# Altium PCB pcdembedded.PcbDoc
Units mil, origin at the board's own origin, x right, y up, seen from the top; angles counter-clockwise.
Board outline 3915 x 3695 mil, 2 copper layers (Top Layer, Bottom Layer); 35 components, 28 nets, 109 pads, 3 vias.
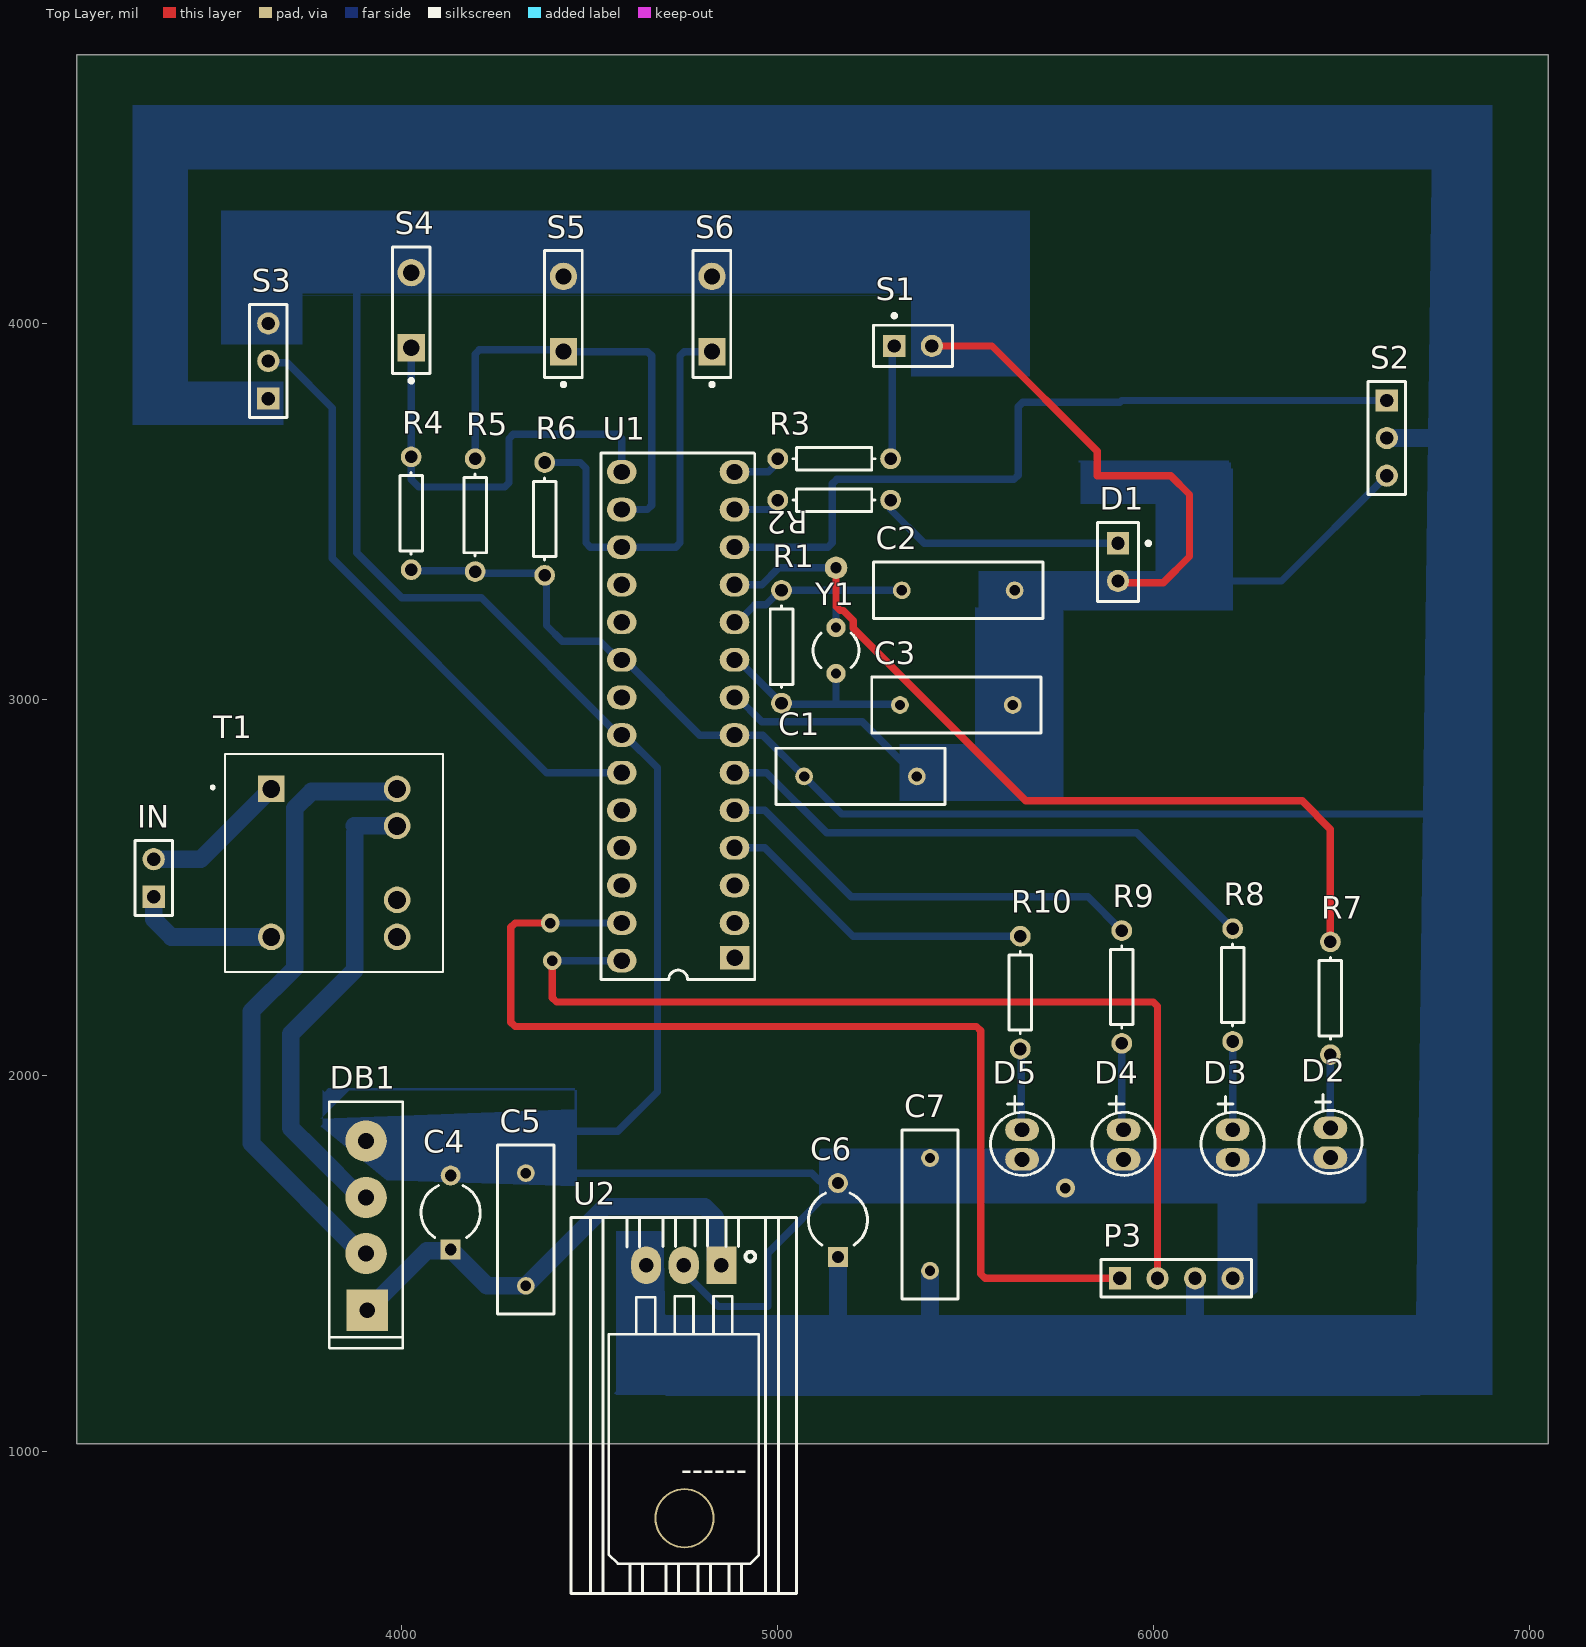
[diagram p0: Top Layer view]
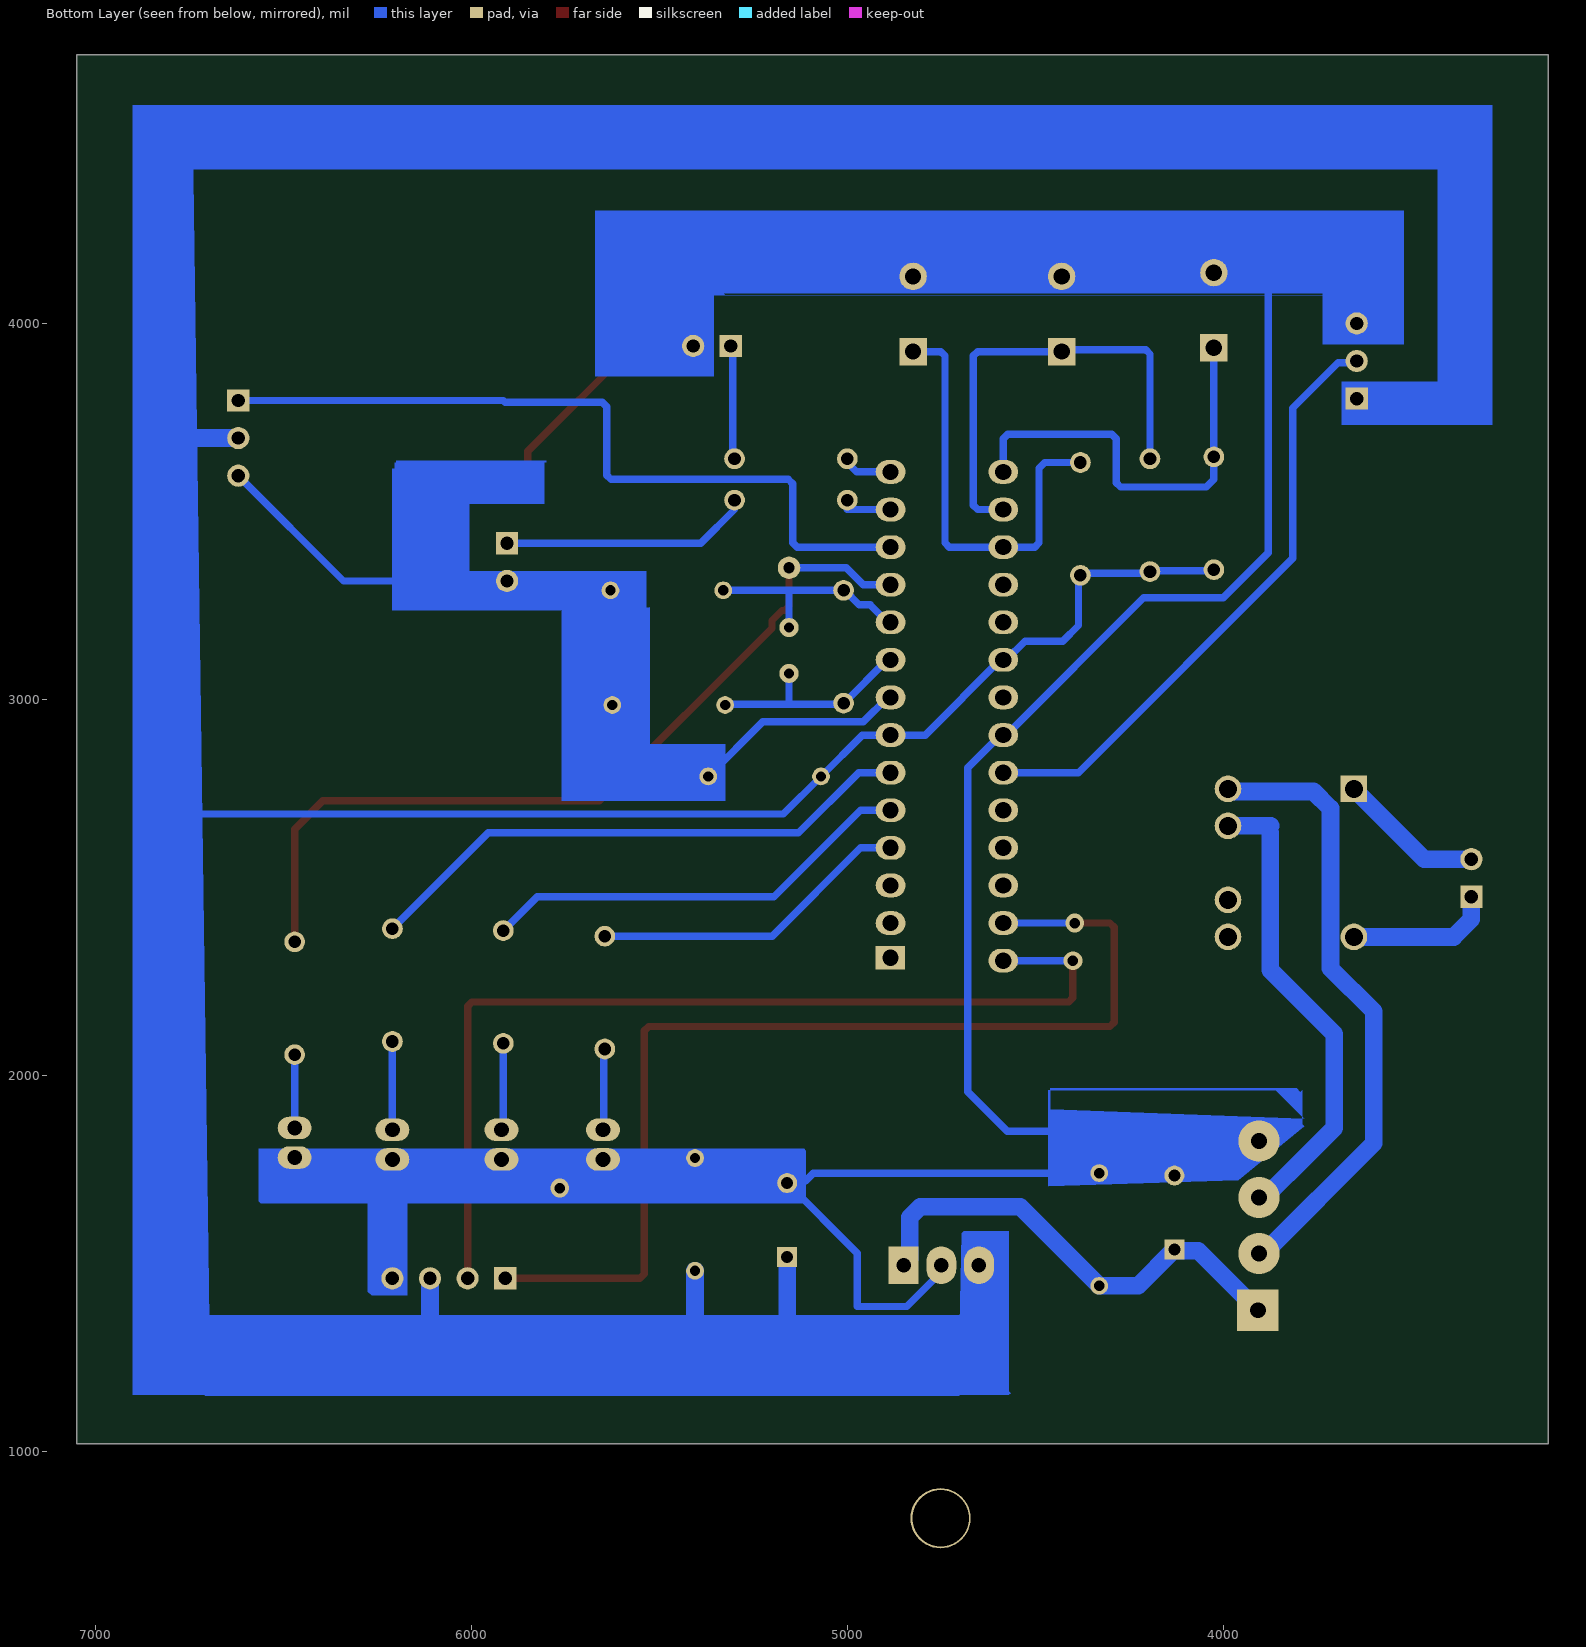
[diagram p1: Bottom Layer view, seen from below]

## Layer stack, top to bottom
Top Solder: solder mask 0.4, Solder Resist, Dk 3.5
Top Layer: signal copper 1.4
Dielectric 1: dielectric 12.6, FR-4, Dk 4.8
Bottom Layer: signal copper 1.4
Bottom Solder: solder mask 0.4, Solder Resist, Dk 3.5

## Board outline
3135,1020 7050,1020 7050,4715 3135,4715

## Design rules (kind name [scope] priority, off if disabled: settings)
Clearance [All] p1: gap=10 ignorepadtopadclearanceinfootprint=FALSE
PolygonConnect [All] p1: connectstyle=Relief reliefconductorwidth=10 reliefentries=4 polygonreliefangle="90 Angle" airgapwidth=10
RoutingVias [All] p1: holewidth=28 width=35 viastyle="Through Hole" minholewidth=28 minwidth=35 maxholewidth=28 maxwidth=35
SolderMaskExpansion [All] p1: expansion=4 istentingtop=FALSE
Width [All] p1: maxlimit=47 minlimit=19.6 preferedwidth=25
30 further rules are at their usual default settings.

## Classes and differential pairs
component class schematicembedded: C1 C2 C3 C4 C5 C6 C7 D1 D2 D3 D5 DB1 IN P3 R1 R2 R3 R4 R5 R6 R7 R8 R9 R10 S1 S2 S3 S4 S5 S6 U1 U2 Y1

## Components (designator, comment, footprint, x,y, rotation, side; value= is the part's Value field where it differs from the comment)
C1 "Cap" RAD-0.3 5220,2795 r180 top value=100pF
C2 "Cap" RAD-0.3 5480,3290 r0 top value=100pF
C3 "Cap" RAD-0.3 5475,2985 r0 top value=100pF
C4 "Cap2" CAPR5-4X5 4130,1635 r90 top value=1000uF/16V
C5 "Cap" RAD-0.3 4330,1590 r270 top value=104
C6 "Cap2" CAPR5-4X5 5160,1615 r90 top value=1000uF/16V
C7 "Cap" RAD-0.3 5405,1630 r270 top value=104
D1 "Bulb" PIN2 5905,3415 r270 top
D2 "LED" CAP10UF 6470,1781.26 r90 top
D3 "LED" CAP10UF 6210,1776.26 r90 top
D4 "LED" CAP10UF 5920,1776.26 r90 top
D5 "LED" CAP10UF 5650,1776.26 r90 top
DB1 "Diode Brideg" "CAU 1A" 3906,1375 r90 top value="Cau 1A"
IN "Header 2" HDR1X2 3340,2475 r90 top
P3 "Header 4" HDR1X4 5910,1460 r0 top
R1 "Res1" AXIAL-0.3 5010,3140 r90 top value=1M
R2 "Res1" AXIAL-0.3 5150,3530 r0 top value=1K
R3 "Res1" AXIAL-0.3 5150,3640 r0 top value=10K
R4 "Res1" AXIAL-0.3 4025,3495 r270 top value=10K
R5 "Res1" AXIAL-0.3 4195,3490 r270 top value=10K
R6 "Res1" AXIAL-0.3 4380,3480 r270 top value=10K
R7 "Res1" AXIAL-0.3 6470,2205 r270 top value=1K
R8 "Res1" AXIAL-0.3 6210,2240 r270 top value=1K
R9 "Res1" AXIAL-0.3 5915,2235 r270 top value=1K
R10 "Res1" AXIAL-0.3 5645,2220 r270 top value=1K
S1 "buzzer" PIN2 5310,3940 r0 top
S2 "servo" HDR1X3 6620,3795 r270 top
S3 "DHT11" HDR1X3 3645,3800 r90 top
S4 "SW-PB" SPST-2 4025,4035 r90 top
S5 "SW-PB" SPST-2 4430,4025 r90 top
S6 "SW-PB" SPST-2 4825,4025 r90 top
T1 "Comment" BOBBIN_EE13/6/6 3820,2565 r0 top
U1 "ATMEGA328P-PU" 27_DIP_7.62mm 4885.39,2312.48 r180 top
U2 "LM7805" QTO-220NH 4850,1495 r180 top
Y1 "XTAL" R38 5155,3130 r180 top

## Footprints (in the part's own frame and the unit in brackets; to place one, negate y for a bottom-side part, rotate by r counter-clockwise, add the part's x,y. Pads: shape width x height; smd on the part's side, far side on the other; paste and mask are expansions set on the pad)
27_DIP_7.62mm [mm]
  rect 2x1.6 hole 1.1: 1(0,0)
  oval 2x1.6 hole 1.1: 2(0.01,-2.35) 3(0.01,-4.89) 4(0.01,-7.43) 5(0.01,-9.97) 6(0.01,-12.51) 7(0.01,-15.05) 8(0.01,-17.59) 9(0.01,-20.13) 10(0.01,-22.67) 11(0.01,-25.21) 12(0.01,-27.75) 13(0.01,-30.29) 14(0.01,-32.83) 15(7.63,-32.83) 16(7.63,-30.29) 17(7.63,-27.75) 18(7.63,-25.21) 19(7.63,-22.67) 20(7.63,-20.13) 21(7.63,-17.59) 22(7.63,-15.05) 23(7.63,-12.51) 24(7.63,-9.97) 25(7.63,-7.43) 26(7.63,-4.89) 27(7.63,-2.35) 28(7.63,0.19)
  silkscreen extent -1.35,-34.1 9.02,1.46, body extent -0.23,-34.26 7.65,1.68, height 4.65
AXIAL-0.3 [mm] "Axial Device, Thru-Hole; 2 Leads; 0.3 in Pin Spacing"
  round 1.4 hole 0.85: 1(-3.81,0) 2(3.81,0)
  silkscreen extent -2.77,-0.76 2.77,0.76
BOBBIN_EE13/6/6 [mm]
  rect 1.8x1.8 hole 1.2: 1(-4.255,5)
  round 1.8 hole 1.2: 2(-4.255,-5) 3(4.255,5) 4(4.255,2.5) 5(4.255,-2.5) 6(4.255,-5)
  silkscreen extent -8.3,-7.36 7.36,7.36
CAP10UF [mil]
  oval 60x90 hole 39.37 unplated: 1(78.74,0) 2(0,0)
  silkscreen extent -42,-84 167,84
CAPR5-4X5 [mm] "Capacitor; 2 Leads"
  rect 1.35x1.35 hole 0.8: 1(-2.5,0)
  round 1.35 hole 0.8: 2(2.5,0)
  silkscreen extent -1.69,-2 1.82,2
"CAU 1A" [mil] "CAU 1A DET"
  rect 110x110 hole 42: 1(0,-2)
  round 110 hole 42: 2(151,1) 3(300,1) 4(450,1)
  silkscreen extent -101,-97 555,99, body extent -62,-90 512,107, height 453
HDR1X2 [mm] "Connector; Header; 2 Position"
  rect 1.5x1.5 hole 0.9: 1(0,0)
  round 1.5 hole 0.9: 2(2.54,0)
  silkscreen extent -1.27,-1.27 3.81,1.27
HDR1X3 [mm] "Connector; Header; 3 Position"
  rect 1.5x1.5 hole 0.9: 1(0,0)
  round 1.5 hole 0.9: 2(2.54,0) 3(5.08,0)
  silkscreen extent -1.27,-1.27 6.35,1.27
HDR1X4 [mm] "Connector; Header; 4 Position"
  rect 1.5x1.5 hole 0.9: 1(0,0)
  round 1.5 hole 0.9: 2(2.54,0) 3(5.08,0) 4(7.62,0)
  silkscreen extent -1.27,-1.27 8.89,1.27
PIN2 [mm] "Photosensitive Diode; 2 Leads"
  rect 1.5x1.5 hole 0.9: 1(0,0)
  round 1.5 hole 0.9: 2(2.54,0)
  silkscreen extent -1.4,-1.4 3.94,2.18
QTO-220NH [mil] "TO-220 - 1-2-3"
  rect 80x100 hole 39: 1(0,0)
  oval 80x100 hole 39: 2(100,0) 3(200,0)
  round 160 hole 150: H(98,673)
  silkscreen extent -200,-127 400,873, body extent -100,-4 300,764, height 165
R38 [mm] "Crystal, Thru-Hole; 2 Leads; Body 3.1 x 8.2 mm (Dia.xH)"
  round 1.3 hole 0.7: 1(0,1.55) 2(0,-1.55)
  silkscreen extent -1.55,-1.19 1.55,1.17
RAD-0.3 [mm] "Radial Cap, Thru-Hole; 2 Leads; 0.3 in Pin Spacing"
  round 1.2 hole 0.7: 1(-3.81,0) 2(3.81,0)
  silkscreen extent -5.71,-1.91 5.71,1.91
SPST-2 [mm] "Switch; 2 Leads"
  rect 1.85x1.85 hole 1.1: 1(-2.54,0)
  round 1.85 hole 1.1: 2(2.54,0)
  silkscreen extent -4.89,-1.27 4.28,1.27

## Part data
C1 C2 C3 C4 C5 C6 C7: "Capacitor", Publisher="Altium Limited"
  C1 C2 C3 C5 C7: LatestRevisionDate=17-Jul-2002, LatestRevisionNote="Re-released for DXP Platform.", PackageDescription="Radial Cap, Thru-Hole; 2 Leads; 0.3 in Pin Spacing", PackageReference=RAD-0.3, Published=8-Jun-2000
  C4 C6: PackageDescription="Capacitor; 2 Leads", PackageReference=CAPR5-4X5, Published=23-Sep-2002
D1: library part Lamp, "Incandescent Bulb", LatestRevisionDate=17-Jul-2002, LatestRevisionNote="Re-released for DXP Platform.", PackageReference=PIN2, Published=24-Mar-1999, Publisher="Altium Limited"
DB1: library part DB, "Convert AC to DC voltage, 4 pin"
IN: "Header, 2-Pin", LatestRevisionDate=17-Jul-2002, LatestRevisionNote="Re-released for DXP Platform.", Publisher="Altium Limited"
P3: "Header, 4-Pin", LatestRevisionDate=17-Jul-2002, LatestRevisionNote="Re-released for DXP Platform.", Publisher="Altium Limited"
R1 R2 R3 R4 R5 R6 R7 R8 R9 R10: "Resistor", LatestRevisionDate=17-Jul-2002, LatestRevisionNote="Re-released for DXP Platform.", PackageDescription="Axial Device, Thru-Hole; 2 Leads; 0.3 in Pin Spacing", PackageReference=AXIAL-0.3, Published=8-Jun-2000, Publisher="Altium Limited"
S1: library part Speaker, "Loudspeaker", LatestRevisionDate=17-Jul-2002, LatestRevisionNote="Re-released for DXP Platform.", PackageReference=PIN2, Published=24-Mar-1999, Publisher="Altium Limited"
S2 S3: library part "Header 3", "Header, 3-Pin", LatestRevisionDate=17-Jul-2002, LatestRevisionNote="Re-released for DXP Platform.", Publisher="Altium Limited"
S4 S5 S6: "Switch", LatestRevisionDate=17-Jul-2002, LatestRevisionNote="Re-released for DXP Platform.", PackageDescription="Switch; 2 Leads", PackageReference=SPST-2, Published=24-Mar-1999, Publisher="Altium Limited"
U1: "ATMEGA328P-PU; 8 bit Microcontroller AVR 20MHz 1; 32kb Flash; 2kb RAM; I2C SPI 2", Case/Package=PDIP, Frequency=20MHz, Manufacturer="Microchip / Atmel", Max Operating Temperature=85°C, Max Supply Voltage=5.5V, Min Operating Temperature=-40°C, Min Supply Voltage=1.8V, Package Quantity=14, Supplier Part Number 1=ATMEGA328P-PU-ND, Category=Microcontrollers, ComponentLink1Description=https://datasheet.ciiva.com/20168/73-4283-20168380.pdf?src-supplier=Rapid+Electronics, ComponentLink1URL=https://datasheet.ciiva.com/20168/73-4283-20168380.pdf?src-supplier=Rapid+Electronics, ComponentLink2Description=https://datasheet.ciiva.com/19457/2139111-19457070.pdf?src-supplier=Jameco, ComponentLink2URL=https://datasheet.ciiva.com/19457/2139111-19457070.pdf?src-supplier=Jameco, ComponentLink3Description=https://datasheet.ciiva.com/1157/1684409-1157696.pdf?src-supplier=Element14, ComponentLink3URL=https://datasheet.ciiva.com/1157/1684409-1157696.pdf?src-supplier=Element14, ComponentLink4Description=https://datasheet.ciiva.com/26818/atmega328p-pu-26818578.pdf?src-supplier=IIIC, ComponentLink4URL=https://datasheet.ciiva.com/26818/atmega328p-pu-26818578.pdf?src-supplier=IIIC, ComponentLink5Description=https://datasheet.ciiva.com/29119/155197-da-01-en-microcontr-atmega328p-pu-8bit-pdip-28-29119593.pdf?src-supplier=Conrad, ComponentLink5URL=https://datasheet.ciiva.com/29119/155197-da-01-en-microcontr-atmega328p-pu-8bit-pdip-28-29119593.pdf?src-supplier=Conrad, ComponentLink6Description=https://datasheet.ciiva.com/15213/getdatasheetpartid-318533-15213133.pdf?src-supplier=Verical, ComponentLink6URL=https://datasheet.ciiva.com/15213/getdatasheetpartid-318533-15213133.pdf?src-supplier=Verical, Contact Plating=Tin,Matte, Core Architecture=AVR, Data Bus Width=8b, Height=3.28mm, Interface=I2C,SPI,UART,USART,2-Wire, Lead Free="Lead Free", Length=37.4mm, Manufacturer Part Number=ATMEGA328P-PU, Max Frequency=20MHz, Memory Size=32KB, Memory Type=FLASH, Mount="Through Hole", Number of ADC Channels=6, Number of I2C Channels=1, Number of I/Os=23, Number of Pins=28, Number of Programmable I/O=23, Number of PWM Channels=6, Number of SPI Channels=1, Number of Timers/Counters=3, Oscillator Type=Internal, Packaging=Rail/Tube, Peripherals="Brown-out Detect/Reset,POR,PWM,WDT", Pricing 1="1=2,08000, 25=1,91000, 100=1,73000 (USD)", Radiation Hardening=No, RAM Size=2KB, REACH SVHC="No SVHC", RoHS=Yes, Stock 1=5280, Supplier 1=Digi-Key, Watchdog Timer=Yes, Width=6.76mm
U2: "TO-220", Text Field1=70, Text Field2=30
Y1: "Crystal Oscillator", LatestRevisionDate=17-Jul-2002, LatestRevisionNote="Re-released for DXP Platform.", PackageDescription="Crystal, Thru-Hole; 2 Leads; Body 3.1 x 8.2 mm (Dia.xH)", PackageReference=R38, Published=8-Jun-2000, Publisher="Altium Limited"

## Free pads (board coordinates)
  round 60 hole 30: 2(5155,3350)

## Via types
v1: diameter 50, hole 28, Top Layer to Bottom Layer, 3 vias

## Nets (pads, with @x,y where several pads share a name; then routed paths per layer and width w, separated by ;. In a path a pad name is that pad's centre, name@x,y a point inside that pad or via, vN(x,y) a via of type N, cw(c..) or ccw(c..) an arc to the next point about the centre after c; other vN are vias at no path point)
+5V: C1.2 C6.1 C7.2 P3.3 R4.2 R5.2 R6.2 S2.2 S3.1 U1.7 U1.20 U2.3 | length 3879.6
  Bottom Layer w19.6: R4.2 4027.5,3342.5 4192.5,3342.5 R5.2 4200,3335 4375,3335 R6.2 4385,3325 4385,3196.48 4426.59,3154.89 4527.23,3154.89 4577.13,3105 U1.20 4592.87,3105 4792.87,2905 U1.7 4960,2905 C1.2 5170,2695 6730,2695 6755,2670 ; 5405,1335 5410,1330
  Bottom Layer w47: 5135,1325 5160,1350 C6.1 ; 5405,1335 C7.2 ; 6105,1240 6198.03,1333.03 ; 6105,1325 6110,1330 P3.3 ; S2.2 6785,3695 6790,3700
bulb: R2.1 U1.13 | length 122.1
  Bottom Layer w19.6: U1.13@4890,3510 U1.13 R2.1@5000,3505
button1: R4.1 S4.1 U1.15 | length 1138.1
  Bottom Layer w19.6: S4.1 R4.1 4025,3585 4045,3565 4273.52,3565 4285,3576.48 4285,3693.52 4296.48,3705 4573.52,3705 4585,3693.52 U1.15
button2: R5.1 S5.1 U1.16 | length 1241.9
  Bottom Layer w19.6: R5.1 4195,3918.52 4206.48,3930 4425,3930 S5.1 4653.52,3925 4665,3913.52 4665,3516.48 4653.52,3505 U1.16
button3: R6.1 S6.1 U1.17 | length 1161
  Bottom Layer w19.6: R6.1 4475,3630 4490,3615 4490,3416.48 4501.48,3405 U1.17 4728.52,3405 4740,3416.48 4740,3913.52 4751.48,3925 S6.1
buzzer: R3.1 U1.14 | length 128.3
  Bottom Layer w19.6: U1.14 4975.39,3605 4995.39,3625 R3.1@5005,3625
"data DHT": S3.2 U1.23 | length 1627.9
  Bottom Layer w19.6: S3.2 3650,3895 3695,3895 3815,3775 3815,3375 4385,2805 U1.23
GND: C1.1 C2.2 C3.2 C4.2 C5.1 C6.2 C7.1 D1.2 D2.2 D3.2 D4.2 D5.2 DB1.4 P3.4 S1.2 S2.3 S3.3 S4.2 S5.2 S6.2 U1.8 U1.22 U2.2 | length 7541
  Top Layer w19.6: S1.2 5570,3940 5850,3660 5850,3595 6045,3595 6095,3545 6095,3380 6025,3310 5910,3310 D1.2
  Bottom Layer w19.6: 3880,4130 3880,3390 4000,3270 4212.13,3270 4577.13,2905 U1.22 4592.87,2905 4680,2817.87 4680,1956.48 4574.4,1850.89 4440.89,1850.89 C5.1 5090.2,1740 5110.36,1719.84 5153.58,1719.84 C6.2 4973.52,1526.94 4973.52,1385 4842,1385 4750,1477 U2.2 ; U1.8 4892.87,3005 4957.87,2940 5225,2940 C1.1 ; D5.2 D5.2@5666.87,1776.26 ; D1.2 6057.47,3315 6340,3315 S2.3
  Bottom Layer w47: 6057.47,3315 6070,3327.53 6070,3430 6095,3455 6095,3543.5
  other v1: 5765,1700
led1: pad.2 R7.1 U1.11 | length 2263.2
  Top Layer w19.6: pad.2 5155,3247.9 5166.48,3236.41 5173.8,3236.41 5200.39,3209.82 5200.39,3189.61 5660,2730 6395,2730 6470,2655 R7.1
  Bottom Layer w19.6: U1.11 4958.02,3305 5003.02,3350 pad.2
led2: R8.1 U1.6 | length 1496.9
  Bottom Layer w19.6: U1.6 4970,2805 5130,2645 5955,2645 R8.1
led3: R9.1 U1.5 | length 1162.5
  Bottom Layer w19.6: U1.5 4965,2705 5195,2475 5825,2475 R9.1
led4: R10.1 U1.4 | length 857.3
  Bottom Layer w19.6: U1.4 4965,2605 5200,2370 R10.1
NetC2_1: C2.1 R1.2 U1.10 Y1.2 | length 581.3
  Bottom Layer w19.6: U1.10 4892.87,3205 4939.06,3251.19 4968.26,3251.19 5007.07,3290 5150,3290 ; Y1.2 5155,3285 5150,3290 ; C2.1 5150,3290
NetC3_1: C3.1 R1.1 U1.9 Y1.1 | length 573.2
  Bottom Layer w19.6: U1.9 4893.94,3105 5008.94,2990 R1.1 5012.5,2987.5 5155,2987.5 ; Y1.1@5156.45,3067.53 Y1.1 5155,2987.5 ; C3.1 5322.5,2987.5 5155,2987.5
NetC4_1: C4.1 C5.2 DB1.1 U2.1 | length 1265.1
  Bottom Layer w47: DB1.1 4066.5,1533.5 4126.93,1533.5 C4.1 4226.57,1440 C5.2 4540,1650 4805.97,1650 4833.5,1622.47 4833.5,1511.5 U2.1
NetD1_1: D1.1 R2.2 | length 642.3
  Bottom Layer w19.6: R2.2@5300,3505 5390,3415 D1.1
NetD2_1: D2.1 R7.2 | length 217.1
  Bottom Layer w19.6: R7.2@6465,2050 R7.2 D2.1@6470,1845
NetD3_1: D3.1 R8.2 | length 245
  Bottom Layer w19.6: D3.1@6210,1845 R8.2
NetD4_1: D4.1 R9.2 | length 240
  Bottom Layer w19.6: D4.1@5915,1845 R9.2
NetD5_1: D5.1 R10.2 | length 237.1
  Bottom Layer w19.6: R10.2 5647.5,2067.5 5647.5,1837.5 D5.1@5650,1835
NetDB1_2: DB1.2 | length 17
  Bottom Layer w47: DB1.2@3892.95,1513.95 DB1.2
NetDB1_3: DB1.3
NetIN_1: IN.1 | length 27.1
  Top Layer w10: IN.1 IN.1@3359.17,2494.17
NetIN_2: IN.2 | length 7.1
  Bottom Layer w19.6: IN.2 IN.2@3345,2580
NetR3_2: R3.2 S1.1 | length 317.1
  Bottom Layer w19.6: R3.2@5305,3625 5305,3935 S1.1
servo: S2.1 U1.12 | length 2095.2
  Bottom Layer w19.6: U1.12 5133.52,3405 5145,3416.48 5145,3573.52 5156.48,3585 5628.52,3585 5640,3596.48 5640,3778.52 5651.48,3790 5910,3790 5915,3795 6267.5,3795 S2.1
"U1 A4": P3.1 U1.27 | length 2833.1
  Top Layer w19.6: v1(4395,2405) 4301.48,2405 4290,2393.52 4290,2141.48 4301.48,2130 5528.52,2130 5540,2118.52 5540,1471.48 5551.48,1460 P3.1
  Bottom Layer w19.6: v1(4395,2405) U1.27
"U1 A5": P3.2 U1.28 | length 2626.5
  Top Layer w19.6: v1(4400,2305) 4400,2206.48 4411.48,2195 5998.52,2195 6010,2183.52 P3.2
  Bottom Layer w19.6: v1(4400,2305) U1.28
pads on no net: T1.1 T1.2 T1.3 T1.4 T1.5 T1.6 U1.1 U1.2 U1.3 U1.18 U1.19 U1.21 U1.24 U1.25 U1.26 U2.H
copper on no net: | length 3710.7
  Bottom Layer w10: 3870,1675 3895,1675 ; 3880.89,1526 3905,1526
  Bottom Layer w47: 3340,2475 3340,2415 3386.85,2368.15 3652.48,2368.15 ; 3340,2575 3465.63,2575 3652.48,2761.85 ; 3873.43,2663.43 3987.52,2663.43 ; 3875,2645 3875,2280 3705,2110 3705,1860 3765,1800 3895,1670 ; 3892.95,1526 3600,1818.95 3600,2170 3715,2285 3715,2710 3760,2755 3985,2755

## Other copper
Bottom Layer:
  rectangle net GND: 5800,3630 6200,3635
  rectangle net GND: 5805,3520 6205,3630
  region net +5V: 3385,3850 3390,3845 3685,3845 3685,3730 3416.3,3730
  region net +5V: 3285,4450 3285,3730 3430,3730 3430,4420 3445,4435
  region net +5V: 6742.31,4580 3285,4580 3285,4410 6810,4410
  region net +5V: 6695,1155 6700,1150 6900,1150 6900,4580 6742.31,4580
  region net GND: 6565,1735 6565,1805 5115,1805 5110,1800 5110,1660 6560,1660 6565,1665
  region net GND: 6170,1690 6170,1415 6265,1415 6275,1425 6275,1675
  region net +5V: 4702.5,1147.5 6707.5,1147.5 6840,1362.5 4697.5,1362.5
  region net +5V: 4695,1580 4690,1585 4570,1585 4570,1160 4565,1155 4570,1150 4705,1150
  region net GND: 3735,3945 3520,3945 3520,4300 5670,4300 5670,3860 5355,3860 5355,4075 3735,4075 5325,4075 5330,4080 3735,4080
  region net GND: 5325,2880 5325,2730 5520,2730 5545,2730 5530,2730 5530,2880
  region net GND: 5525,3245 5525,2730 5760,2730 5760,3235 5755,3240
  region net GND: 6210,3613.58 6210,3236.42 5545,3236.42 5535,3226.42 5535,3341.42 6005,3341.42 6005,3619.12
  region net GND: 3785,1885 3860,1960 4465,1960 4465,1705 3960.21,1720.77 3784.97,1864.97 3790,1870 3790,1960 3795,1955 3805,1965 4460,1965 4460,1910

## Text inside footprints (layer, text, board x,y; h text height)
U2: Top Overlay "------" at 4919,968 h60 r180